# Altium PCB RM126X_PCB_Footprint.PcbDoc
Units mm, origin at the board's own origin, x right, y up, seen from the top; angles counter-clockwise.
Board outline 13 x 14 mm, 2 copper layers (Top Layer, Bottom Layer); 1 components, 0 nets, 47 pads, 0 vias.
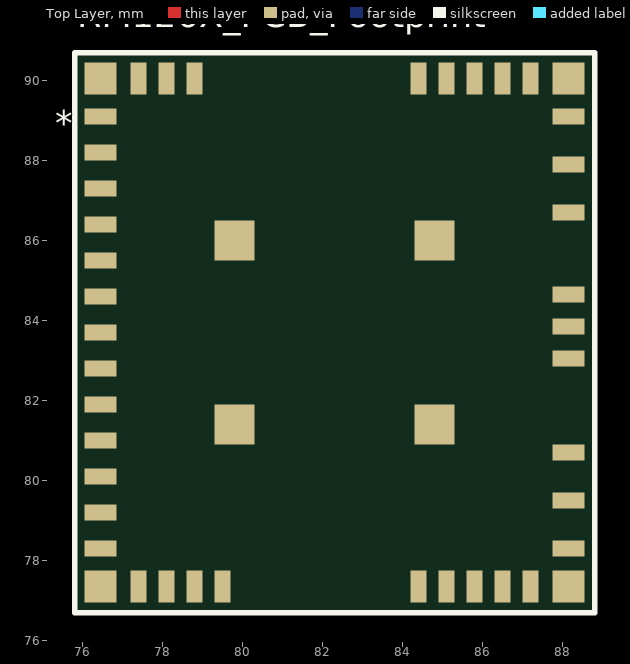
[diagram p0: Top Layer view]
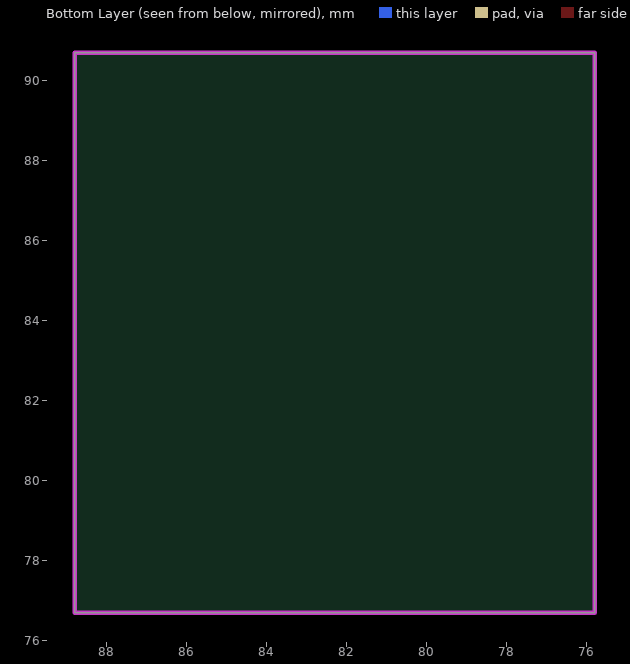
[diagram p1: Bottom Layer view, seen from below]

## Layer stack, top to bottom
Top Solder: solder mask 0.0102, Solder Resist, Dk 3.5
Top Layer: signal copper 0.0356
Dielectric 1: dielectric 0.32, FR-4, Dk 4.8
Bottom Layer: signal copper 0.0356
Bottom Solder: solder mask 0.0102, Solder Resist, Dk 3.5

## Board outline
75.796,76.693 75.796,90.693 88.796,90.693 88.796,76.693

## Design rules (kind name [scope] priority, off if disabled: settings)
Clearance [All] p1: gap=0.254 ignorepadtopadclearanceinfootprint=FALSE except(0: Arc-Hole Track-Hole SMDPad-Hole THPad-Hole Via-Hole Fill-Hole Poly-Hole Region-Hole Text-Hole)
PolygonConnect [All] p1: connectstyle=Relief reliefconductorwidth=0.254 reliefentries=4 polygonreliefangle="90 Angle" airgapwidth=0.254
RoutingVias [All] p1: holewidth=0.711 width=1.27 viastyle="Through Hole" minholewidth=0.711 minwidth=1.27 maxholewidth=0.711 maxwidth=1.27
SolderMaskExpansion [All] p1: expansion=0.102 istentingtop=FALSE
Width [All] p1: maxlimit=0.254 minlimit=0.254 preferedwidth=0.254
30 further rules are at their usual default settings.

## Components (designator, comment, footprint, x,y, rotation, side; value= is the part's Value field where it differs from the comment)
RM126X_PCB_Footprint "Comment" "Ezurio, RM126X, Platform side" 82.296,83.693 r0 top locked

## Footprints (in the part's own frame and the unit in brackets; to place one, negate y for a bottom-side part, rotate by r counter-clockwise, add the part's x,y. Pads: shape width x height; smd on the part's side, far side on the other; paste and mask are expansions set on the pad)
"Ezurio, RM126X, Platform side" [mm] "Ezurio, RM126X, Platform Side"
  rect 0.8x0.4 smd mask+0.051: 1(-5.85,5.4) 2(-5.85,4.5) 3(-5.85,3.6) 4(-5.85,2.7) 5(-5.85,1.8) 6(-5.85,0.9) 7(-5.85,0) 8(-5.85,-0.9) 9(-5.85,-1.8) 10(-5.85,-2.7) 11(-5.85,-3.6) 12(-5.85,-4.5) 13(-5.85,-5.4) 23(5.85,-5.4) 24(5.85,-4.2) 25(5.85,-3) 26(5.85,-0.65) 27(5.85,0.15) 28(5.85,0.95) 29(5.85,3) 30(5.85,4.2) 31(5.85,5.4)
  rect 0.4x0.8 smd mask+0.051: 14(-4.9,-6.35) 15(-4.2,-6.35) 16(-3.5,-6.35) 17(-2.8,-6.35) 18(2.1,-6.35) 19(2.8,-6.35) 20(3.5,-6.35) 21(4.2,-6.35) 22(4.9,-6.35) 32(4.9,6.35) 33(4.2,6.35) 34(3.5,6.35) 35(2.8,6.35) 36(2.1,6.35) 37(-3.5,6.35) 38(-4.2,6.35) 39(-4.9,6.35)
  rect 0.8x0.8 smd mask+0.051: 40(-5.85,6.35) 41(-5.85,-6.35) 42(5.85,-6.35) 43(5.85,6.35)
  rect 1x1 smd mask+0.051: 44(2.5,2.3) 45(-2.5,2.3) 46(2.5,-2.3) 47(-2.5,-2.3)
  silkscreen extent -6.5,-7 6.5,7, body extent -6.5,-7 6.5,7, height 2.49

## Nets (pads, with @x,y where several pads share a name; then routed paths per layer and width w, separated by ;. In a path a pad name is that pad's centre, name@x,y a point inside that pad or via, vN(x,y) a via of type N, cw(c..) or ccw(c..) an arc to the next point about the centre after c; other vN are vias at no path point)
pads on no net: RM126X_PCB_Footprint.1 RM126X_PCB_Footprint.2 RM126X_PCB_Footprint.3 RM126X_PCB_Footprint.4 RM126X_PCB_Footprint.5 RM126X_PCB_Footprint.6 RM126X_PCB_Footprint.7 RM126X_PCB_Footprint.8 RM126X_PCB_Footprint.9 RM126X_PCB_Footprint.10 RM126X_PCB_Footprint.11 RM126X_PCB_Footprint.12 RM126X_PCB_Footprint.13 RM126X_PCB_Footprint.14 RM126X_PCB_Footprint.15 RM126X_PCB_Footprint.16 RM126X_PCB_Footprint.17 RM126X_PCB_Footprint.18 RM126X_PCB_Footprint.19 RM126X_PCB_Footprint.20 RM126X_PCB_Footprint.21 RM126X_PCB_Footprint.22 RM126X_PCB_Footprint.23 RM126X_PCB_Footprint.24 RM126X_PCB_Footprint.25 RM126X_PCB_Footprint.26 RM126X_PCB_Footprint.27 RM126X_PCB_Footprint.28 RM126X_PCB_Footprint.29 RM126X_PCB_Footprint.30 RM126X_PCB_Footprint.31 RM126X_PCB_Footprint.32 RM126X_PCB_Footprint.33 RM126X_PCB_Footprint.34 RM126X_PCB_Footprint.35 RM126X_PCB_Footprint.36 RM126X_PCB_Footprint.37 RM126X_PCB_Footprint.38 RM126X_PCB_Footprint.39 RM126X_PCB_Footprint.40 RM126X_PCB_Footprint.41 RM126X_PCB_Footprint.42 RM126X_PCB_Footprint.43 RM126X_PCB_Footprint.44 RM126X_PCB_Footprint.45 RM126X_PCB_Footprint.46 RM126X_PCB_Footprint.47

## Keep-outs
Keep-Out Layer:
  the board outline again, w0.102

## Text inside footprints (layer, text, board x,y; h text height)
RM126X_PCB_Footprint: Top Assembly "*" at 76.071,88.646 h0.64; Top Overlay "*" at 75.314,88.614 h0.64